# Altium PCB V8.PCBDOC
Units mm, origin at the board's own origin, x right, y up, seen from the top; angles counter-clockwise.
Board outline 177.64 x 101.09 mm, 2 copper layers (Top Layer, Bottom Layer); 4 components, 227 nets, 0 pads, 26 vias.
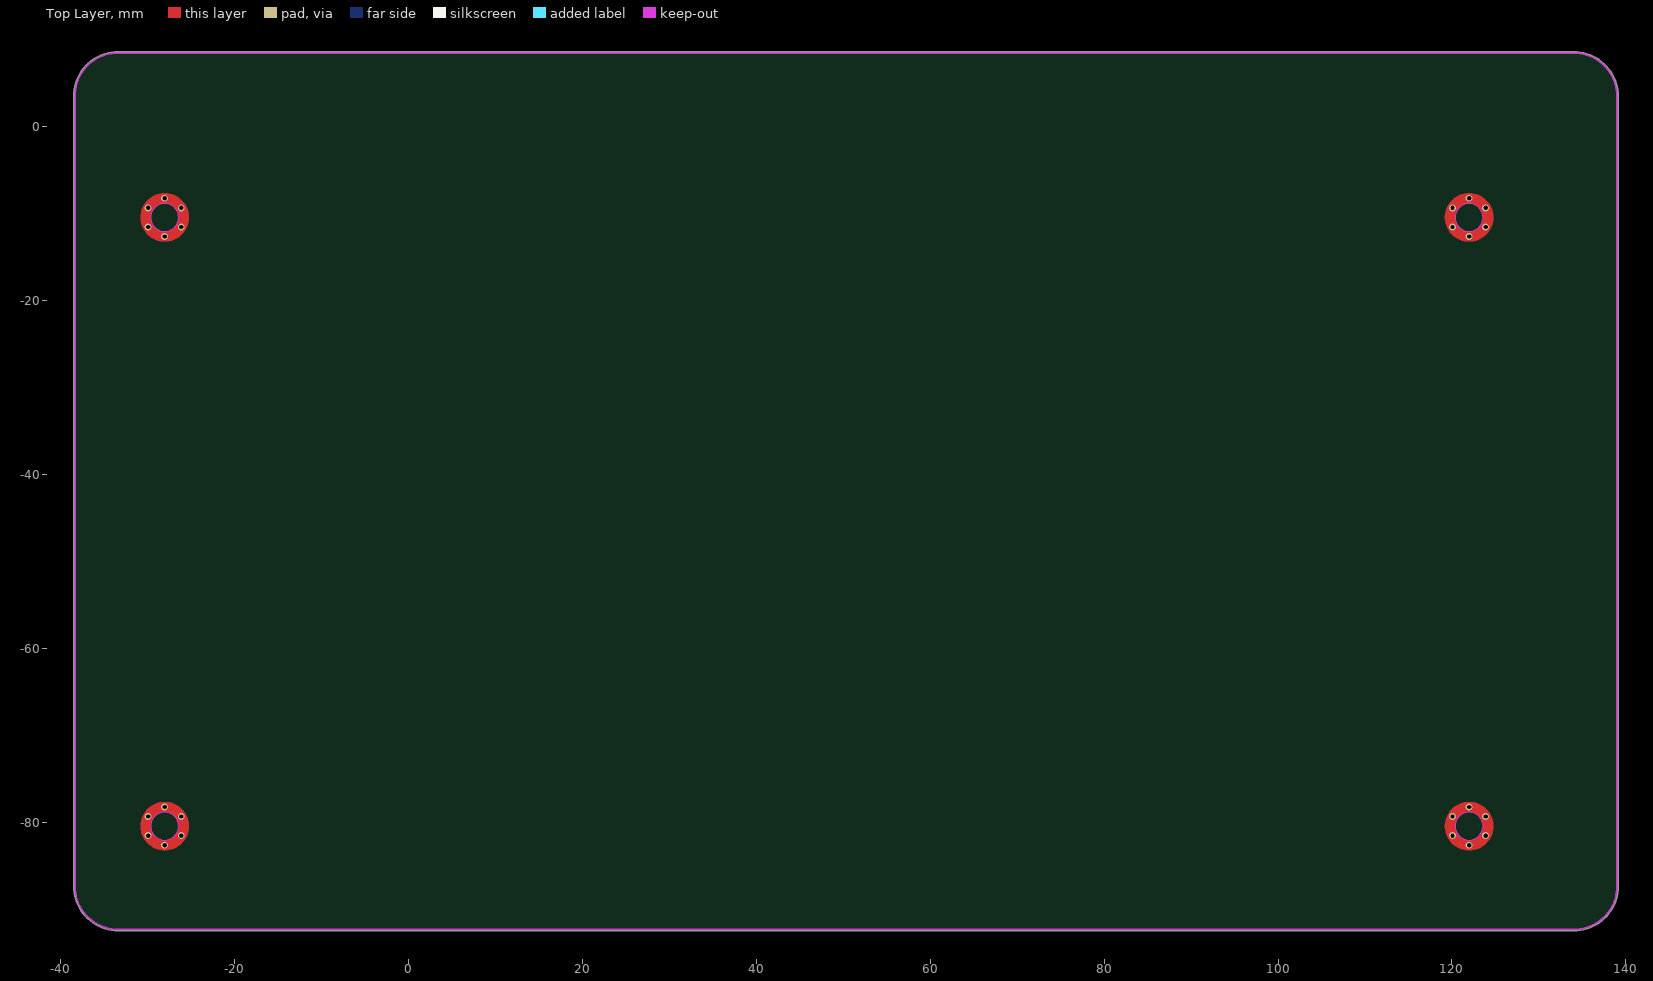
[diagram p0: Top Layer view]
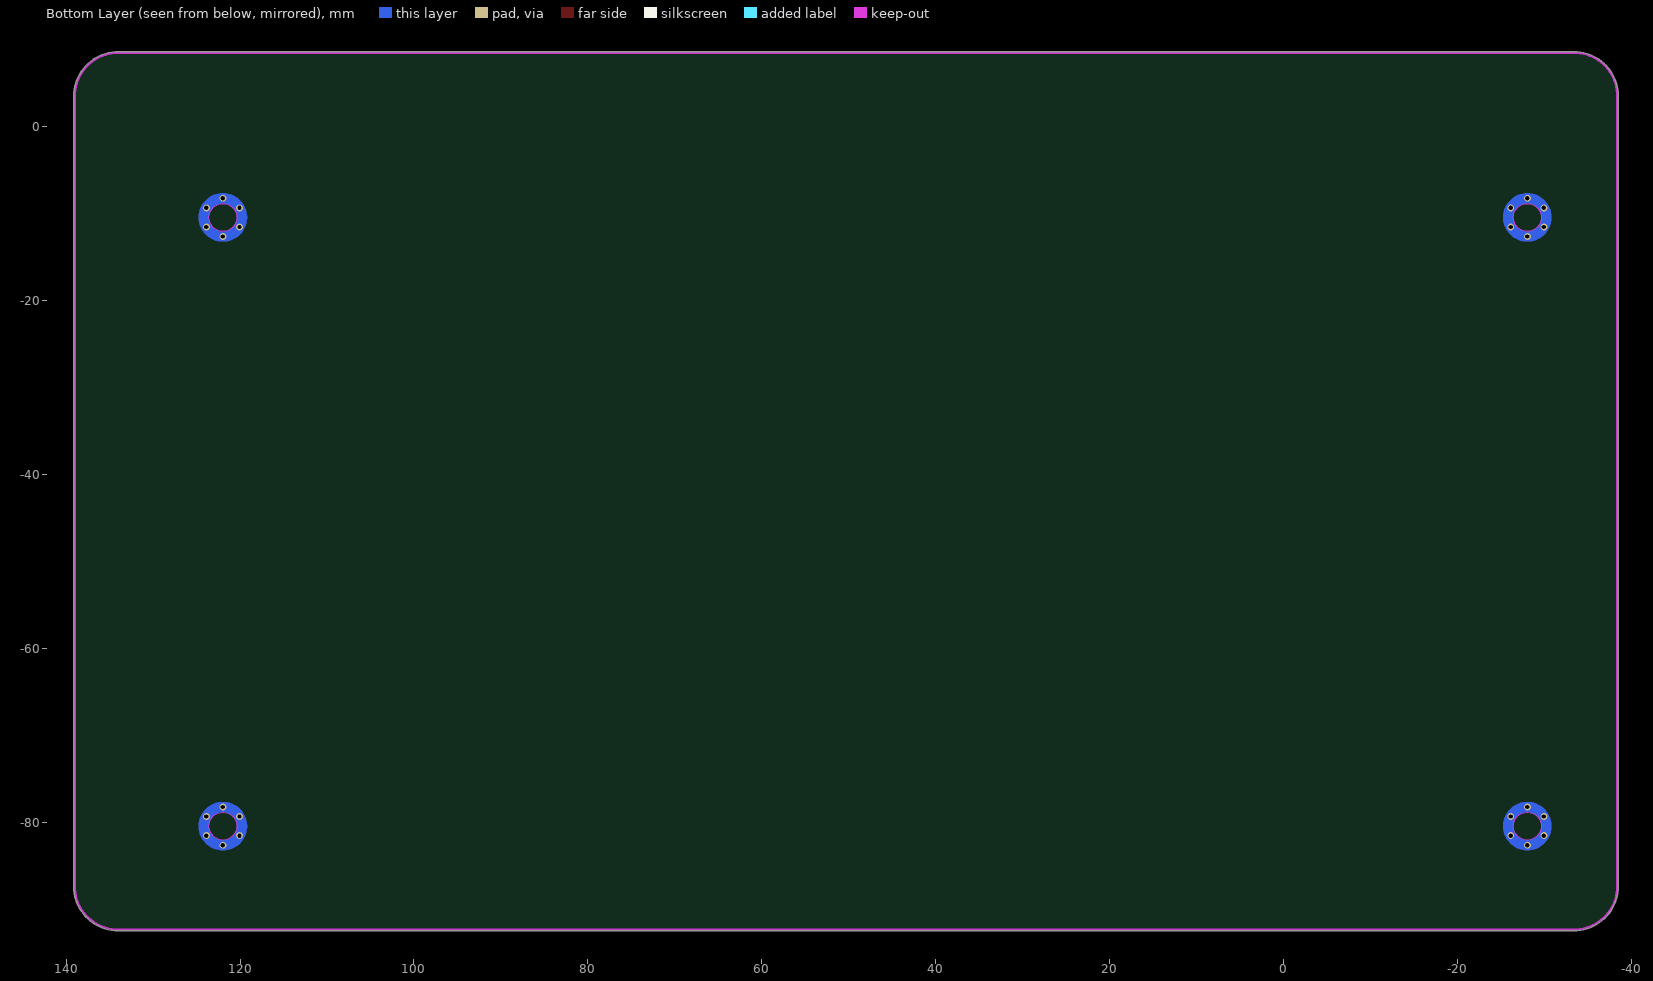
[diagram p1: Bottom Layer view, seen from below]

## Layer stack, top to bottom
Top Layer: signal copper 0.0356
Dielectric: dielectric 0.32, FR-4, Dk 4.8
Bottom Layer: signal copper 0.0356

## Board outline
-38.503,-87.37 cw(c-33.376,-87.369) -38.503,-87.369 -38.503,3.469 cw(c-38.376,3.469) -38.503,3.47 cw(c-33.376,3.469) -33.376,8.596 cw(c-33.376,8.469) -33.375,8.596 133.965,8.596 cw(c133.965,3.421) 139.14,3.421 139.14,-87.43 cw(c139.013,-87.43) 139.14,-87.441 cw(c134.013,-87.369) 134.013,-92.496 -33.376,-92.496 cw(c-33.376,-92.369) -33.378,-92.496 ccw(c-33.376,-87.369) -33.376,-92.496 -33.378,-92.496 cw(c-33.376,-87.369)

## Design rules (kind name [scope] priority, off if disabled: settings)
Clearance sgnd [WithinRoom(Room1) vs InPoly] p1: gap=0.381
Clearance poly [InPoly] p2: gap=0.508
Clearance [All] p3: gap=0.203
ComponentClearance [All] p1: gap=0.254 collisioncheckmode=3 verticalgap=0.254
PlaneConnect gndvia [All] p1: planeconnectstyle=Relief reliefexpansion=1.2 reliefentries=4 reliefconductorwidth=0.6 reliefairgap=0.6
PlaneConnect [All] p2: planeconnectstyle=Relief reliefexpansion=0.508 reliefentries=4 reliefconductorwidth=0.254 reliefairgap=0.254
PolygonConnect via [IsVia] p1: connectstyle=Direct reliefconductorwidth=0.254 reliefentries=4 polygonreliefangle="90 Angle"
PolygonConnect [All] p2: connectstyle=Direct reliefconductorwidth=0.254 reliefentries=4 polygonreliefangle="90 Angle"
RoutingVias [All] p1: holewidth=0.4 width=0.8 viastyle="Through Hole" minholewidth=0.4 minwidth=0.8 maxholewidth=1.016 maxwidth=2.032
SolderMaskExpansion [All] p1: expansion=0.102
TestPointUsage FabricationTestPointUsage [All] p1: valid=0 allowmultiple=FALSE
Testpoint FabricationTestpoint [All] p1: side=3 testpointundercomponent=TRUE minsize=1.016 maxsize=2.54 preferedsize=1.524 minholesize=0 maxholesize=1.016 preferedholesize=0.813 testpointgrid=0.025 style=297 order=0123456789
Width PW_1 [InNetClass('PW')] p1: maxlimit=1.27 minlimit=0.254 preferedwidth=0.508
Width VCC [InNet('GND')] p2 off: maxlimit=0.5 minlimit=0.254 preferedwidth=0.381
Width [All] p3 off: maxlimit=2.5 minlimit=0.254 preferedwidth=0.254
17 further rules are at their usual default settings.

## Classes and differential pairs
net class PW: ANT ANT1 BT BTIN
net class VDD: AGND AVDD DVCC DVCIN GND VCC
component class "Components Class 1": M1

## Components (designator, comment, footprint, x,y, rotation, side; value= is the part's Value field where it differs from the comment)
? "" "3mm Hole" 121.97,-80.471 r180 top
? "" "3mm Hole" 121.97,-10.471 r180 top
? "" "3mm Hole" -28.03,-10.471 r180 top
? "" "3mm Hole" -28.03,-80.471 r180 top

## Footprints (in the part's own frame and the unit in brackets; to place one, negate y for a bottom-side part, rotate by r counter-clockwise, add the part's x,y. Pads: shape width x height; smd on the part's side, far side on the other; paste and mask are expansions set on the pad)
"3mm Hole" [mm]
  Top Layer circle w1.2: c0,0 r2.2
  Bottom Layer circle w1.2: c0,0 r2.2
  Keep-Out Layer circle w0.127: c0,0 r1.6

## Via types
v1: diameter 0.8, hole 0.5, Top Layer to Bottom Layer, 24 vias
v2: diameter 1.27, hole 0.711, Top Layer to Bottom Layer, 2 vias

## Nets (pads, with @x,y where several pads share a name; then routed paths per layer and width w, separated by ;. In a path a pad name is that pad's centre, name@x,y a point inside that pad or via, vN(x,y) a via of type N, cw(c..) or ccw(c..) an arc to the next point about the centre after c; other vN are vias at no path point)
5V: 
9v: 
24: 
24V: 
/RST: 
/RST/NMI: 
A1-1: 
A1-2: 
A1-3: 
A1-4: 
A1-5: 
A1-6: 
A1-7: 
A1-8: 
A2-1: 
A2-2: 
A2-3: 
A2-4: 
A2-5: 
A2-6: 
A2-7: 
A2-8: 
ADJ: 
AGND: 
ANT: 
ANT1: 
ANT2: 
AVDD: 
B1-1: 
B1-2: 
B1-3: 
B1-4: 
B1-5: 
B1-6: 
B1-7: 
B1-8: 
B2-1: 
B2-2: 
B2-3: 
B2-4: 
B2-5: 
B2-6: 
B2-7: 
B2-8: 
BT: 
BT-OUT: 
BTIN: 
BTIN0: 
CAN-H: 
CAN-L: 
DGND: 
DIN: 
DOUT: 
DVCC: 
DVCIN: 
ENB-1: 
GND: 
LED: 
LED1: 
LED2: 
M2-ON: 
MXA: 
NewNet: 
P1.0: 
P1.1: 
P1.2: 
P1.3: 
P1.4: 
P1.5: 
P1.6: 
P1.7: 
P2.0: 
P2.1: 
P2.2: 
P2.3: 
P2.4: 
P2.5: 
P2.6: 
P2.7: 
P3.0: 
P3.1: 
P3.2: 
P3.3: 
P3.4: 
P3.5: 
P3.6: 
P3.7: 
P4.0: 
P4.1: 
P4.2: 
P4.3: 
P4.4: 
P4.5: 
P4.6: 
P4.7: 
P5.0: 
P5.1: 
P5.2: 
P5.3: 
P5.4: 
P5.5: 
P5.6: 
P5.7: 
P6.0: 
P6.1: 
P6.2: 
P6.3: 
P6.4: 
P6.5: 
P6.6: 
P6.7: 
P7.0: 
P7.1: 
P7.2: 
P7.3: 
P7.4: 
P7.5: 
P7.6: 
P7.7: 
P8.0: 
P8.1: 
P8.2: 
P8.3: 
P8.4: 
P8.5: 
P8.6: 
P8.7: 
P10: 
P10.0: 
P10.1: 
P10.2: 
P10.3: 
P10.4: 
P10.5: 
P10.6: 
P10.7: 
P11: 
P11.0: 
P11.1: 
P11.2: 
P12: 
P13: 
P14: 
P15: 
P16: 
P17: 
P20: 
P21: 
P22: 
P23: 
P24: 
P25: 
P26: 
P27: 
P30: 
P31: 
P32: 
P33: 
P34: 
P35: 
P36: 
P37: 
P40: 
P41: 
P42: 
P43: 
P44: 
P45: 
P46: 
P47: 
P50: 
P51: 
P52: 
P53: 
P54: 
P55: 
P56: 
P57: 
P60: 
P61: 
P62: 
P63: 
P64: 
P65: 
P66: 
P67: 
P70: 
P71: 
P72: 
P73: 
P74: 
P75: 
P76: 
P77: 
P80: 
P81: 
P82: 
P83: 
P84: 
P85: 
P86: 
P87: 
P90: 
P91: 
P92: 
P93: 
P94: 
P95: 
P96: 
P97: 
P-IN: 
P-OUT: 
PIN: 
RST1: 
SET: 
SGND: 
TCK: 
TCK1: 
TDI: 
TDO: 
TMS: 
TVCC: 
VCC: 
VCORE: 
VO2: 
XIN: 
XOUT: 
copper on no net:
  other v1: -28.03,-82.671 121.97,-82.671 -29.935,-81.571 -26.125,-81.571 120.065,-81.571 123.875,-81.571 -29.935,-79.371 -26.125,-79.371 120.065,-79.371 123.875,-79.371 -28.03,-78.271 121.97,-78.271 -28.03,-12.671 121.97,-12.671 -29.935,-11.571 -26.125,-11.571 120.065,-11.571 123.875,-11.571 -29.935,-9.371 -26.125,-9.371 120.065,-9.371 123.875,-9.371 -28.03,-8.271 121.97,-8.271
  other v2: 403.733,154.559 452.755,189.357

## Keep-outs
Keep-Out Layer:
  lines w0.254: 139.013,-87.43 139.013,3.421 ccw(c133.965,3.421) 133.965,8.469 -33.376,8.469 ccw(c-33.376,3.469) -38.376,3.469 -38.376,-87.369 ccw(c-33.376,-87.369) -33.376,-92.369 134.013,-92.369 ccw(c134.013,-87.369) 139.013,-87.369